# EAGLE board EagleCADAssignment (EAGLE 9.5.2)
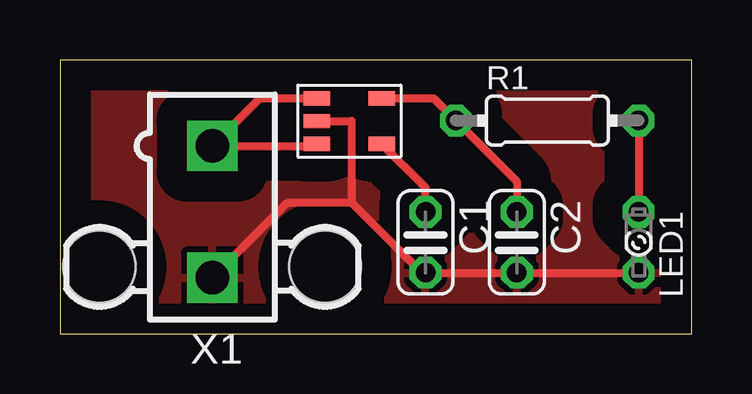
[diagram p0: board, top side]

Size 26.34 x 11.42 mm. Coordinates in mm from the lower left corner, seen from the top.
Outline: 0,0 26.34,0 26.34,11.42 0,11.42 0,0
Copper layers (1*16): Top 0.035mm / dielectric 1.5mm / Bottom 0.035mm
Design rules "MWSEagleDesignRules3": minimum track width 13mil, minimum drill 22mil, track to track 8.5mil, track to pad 8.5mil, pad to pad 8.5mil, via to via 8.5mil, smd to smd 8mil, copper to edge 40mil, drill to drill 8mil, minimum pad ring 10mil, minimum via ring 8mil, stop-mask expansion 4mil, vias tented up to drill 0mil, thermal gap 10mil

## Footprints (pad centres in the part's own frame; a part is rotated, then mirrored left to right if it is on the bottom)
C025-024X044 = drill 0.813 octagon: 1 -1.27,0; 2 1.27,0
LSU260 = drill 0.813 octagon: A -1.27,0; K 1.27,0
0204/7 = drill 0.813 octagon: 1 -3.81,0; 2 3.81,0
TPS799 = smd 1.1 x 0.6: EN 0.55,0.3; GND 0.55,1.25; IN 0.55,2.2; NR 3.25,0.3; OUT 3.25,2.2
5566-2 = drill 1.4 square: 1 0,-2.75; 2 0,2.75 | hole 3: 4.7,2.29; -4.7,2.29

## Placement (x,y rotation side)
C1  [C025-024X044]  15.24,3.81 270 top
C2  [C025-024X044]  19.05,3.81 270 top
LED1  [LSU260]  24.13,3.81 270 top
R1  [0204/7]  20.32,8.89 0 top
U$1  TPS799  [TPS799]  10.16,7.62 0 top
X1  5566-2  [5566-2]  6.35,5.08 180 top

## Library data of the parts
C1 C2 = rcl; SPICEPREFIX: C
LED1 = led
R1 = rcl; SPICEPREFIX: R
U$1 = TPS799
X1 = con-molex; MF: MOLEX; OC_FARNELL: 1822072; OC_NEWARK: unknown

## Nets
GND: C1.2 C2.2 LED1.K U$1.GND X1.2
N$1: C1.1 U$1.NR
N$2: C2.1 R1.1 U$1.OUT
N$3: LED1.A R1.2
N$4: U$1.EN U$1.IN X1.1

## Tracks (layer width: path | path; a pad name or v marks a point on that pad's centre or on a via)
GND
  Top 0.33: 12.16,5.47 15.09,2.54 C1.2 C2.2 LED1.K | X1.2 9.49,5.47 12.16,5.47 | U$1.GND 12.16,8.87 12.16,5.47
  pour Top (isolate 1.27): 0.15,0 26.44,0 26.44,11.43 0,11.43 0,0.1 0.15,0.1
N$1
  Top 0.33: C1.1 15.24,6.09 U$1.NR
N$2
  Top 0.33: U$1.OUT 15.58,9.82 R1.1 19.05,6.35 C2.1
N$3
  Top 0.33: R1.2 LED1.A
N$4
  Top 0.33: U$1.EN 10.71,7.83 X1.1 8.34,9.82 U$1.IN